# Altium PCB PCB.PcbDoc
Units mm, origin at the board's own origin, x right, y up, seen from the top; angles counter-clockwise.
Board outline 85.09 x 17.91 mm, 4 copper layers (Top Layer, GND, PWR, Bottom Layer), stack 1.11 mm thick; 46 components, 32 nets, 228 pads, 98 vias.
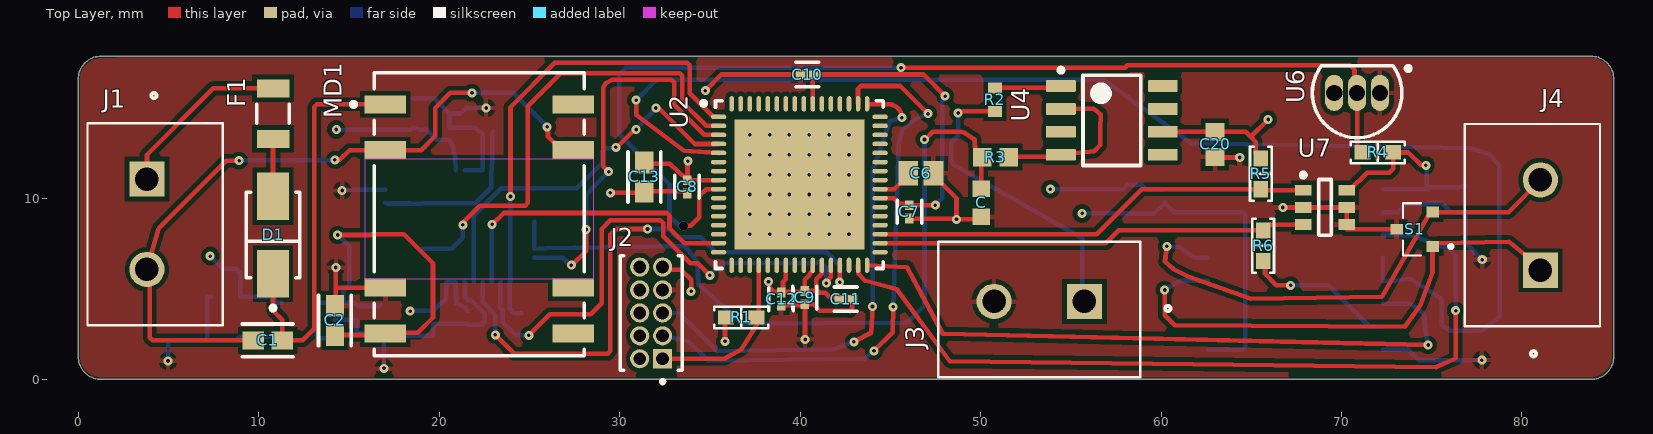
[diagram p0: Top Layer view]
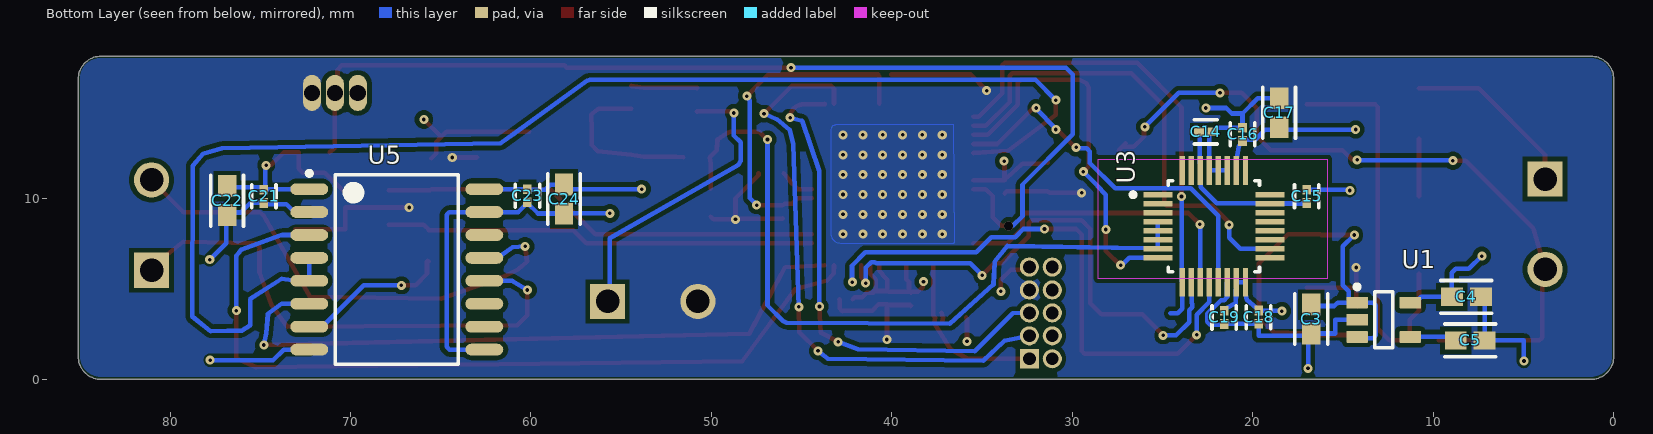
[diagram p1: Bottom Layer view, seen from below]
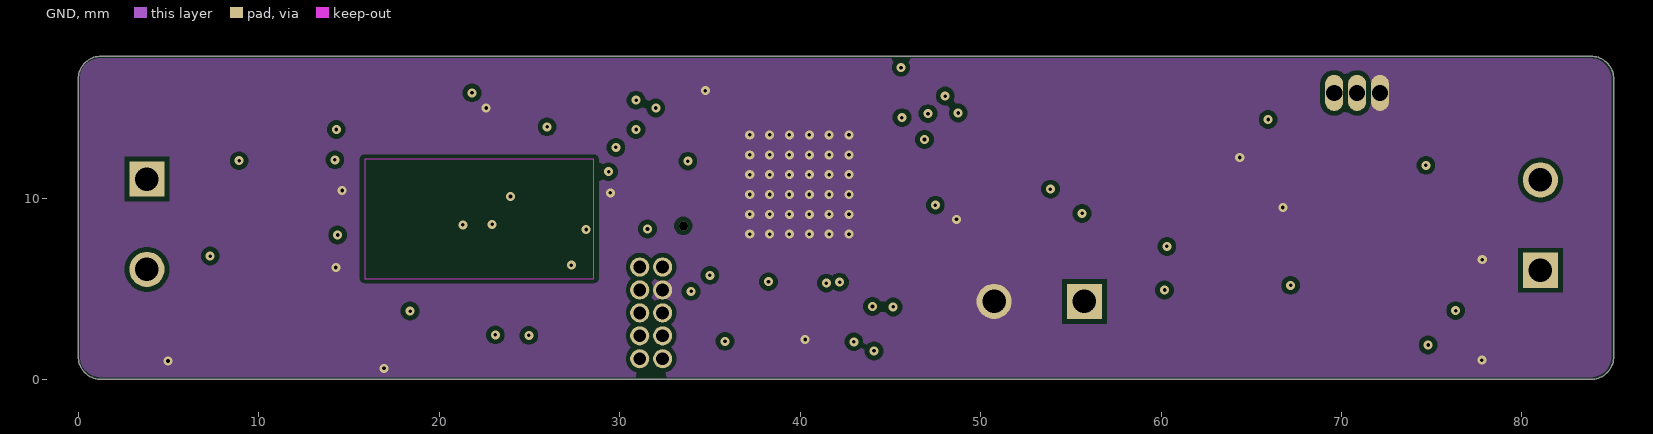
[diagram p2: GND]
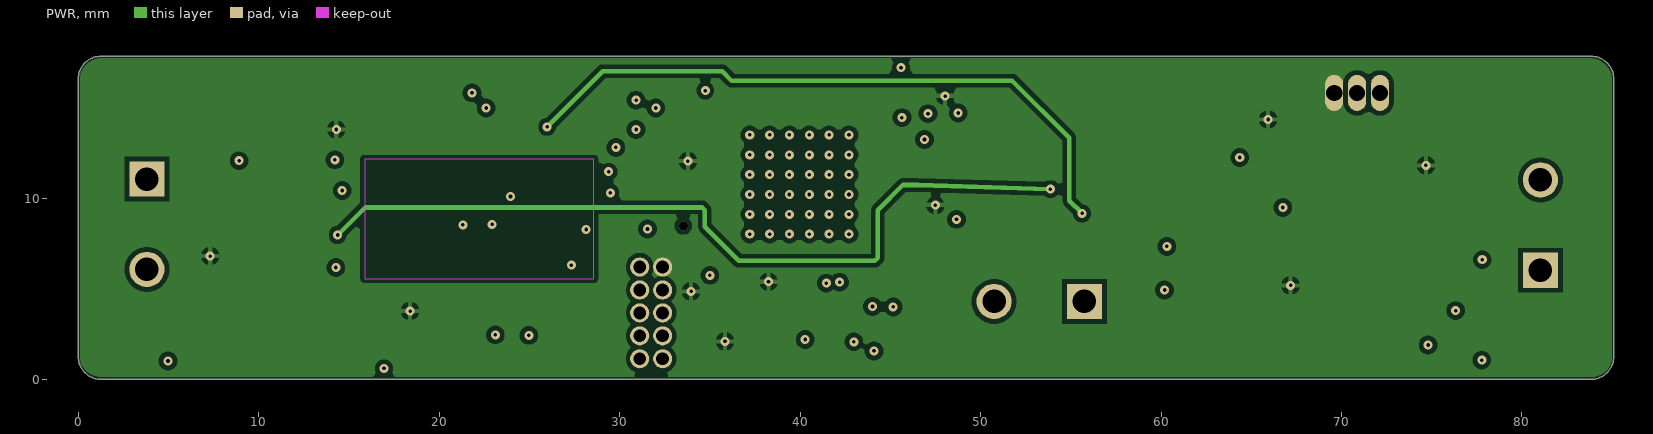
[diagram p3: PWR]
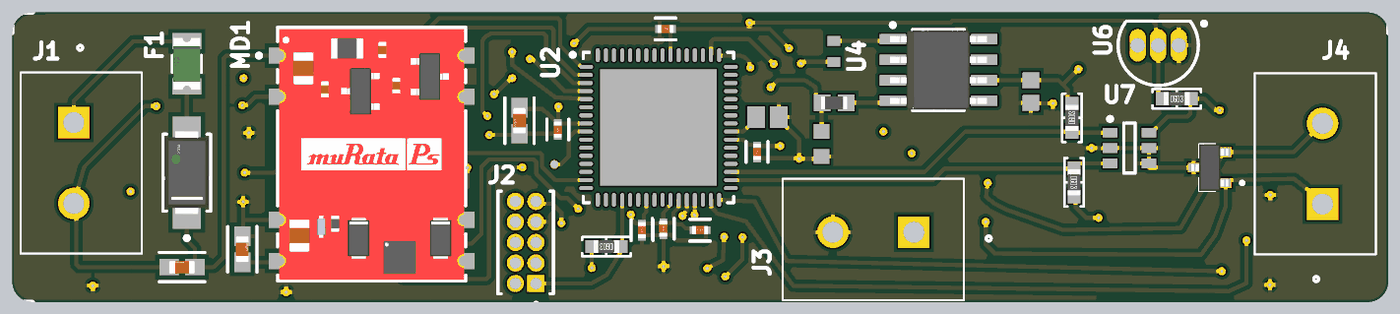
[diagram p4: 3D render of the assembled board from above, using the file's embedded part models]
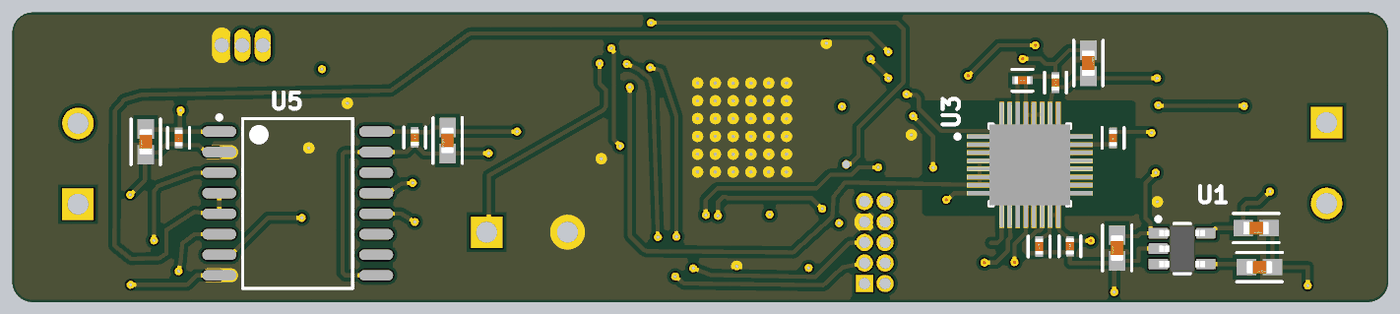
[diagram p5: 3D render of the assembled board from below, using the file's embedded part models]

## Layer stack, top to bottom
Top Solder: solder mask 0.0254, SM-001, Dk 4
Top Layer: signal copper 0.035
Dielectric 2: prepreg 0.1295, PP-017, Dk 4.3
GND: signal copper 0.035
Dielectric 3: core 0.7112, Core-039, Dk 4.8
PWR: signal copper 0.035
Dielectric 4: prepreg 0.1295, PP-017, Dk 4.3
Bottom Layer: signal copper 0.035
Bottom Solder: solder mask 0.0254, SM-001, Dk 4

## Board outline
0,1.27 0,16.637 cw(c1.27,16.637) 1.27,17.907 83.82,17.907 cw(c83.82,16.637) 85.09,16.637 85.09,1.27 cw(c83.82,1.27) 83.82,0 1.27,0 cw(c1.27,1.27)

## Design rules (kind name [scope] priority, off if disabled: settings)
Clearance [All] p1: gap=0.254 ignorepadtopadclearanceinfootprint=FALSE
PolygonConnect PolygonConnect_11 [All vs IsNamedPolygon('ISO_GND_L01_P023')] p1: connectstyle=Direct reliefconductorwidth=0.254 reliefentries=4 polygonreliefangle="90 Angle" airgapwidth=0.254
PolygonConnect PolygonConnect_10 [All vs IsNamedPolygon('ISO_GND_L01_P023')] p2: connectstyle=Direct reliefconductorwidth=0.254 reliefentries=4 polygonreliefangle="90 Angle" airgapwidth=0.254
PolygonConnect PolygonConnect_9 [All vs IsNamedPolygon('ISO_GND_L04_P024')] p3: connectstyle=Direct reliefconductorwidth=0.254 reliefentries=4 polygonreliefangle="90 Angle" airgapwidth=0.254
PolygonConnect PolygonConnect_8 [All vs IsNamedPolygon('C_AVDD_L03_P018')] p4: connectstyle=Direct reliefconductorwidth=0.254 reliefentries=4 polygonreliefangle="90 Angle" airgapwidth=0.254
PolygonConnect PolygonConnect_7 [All vs IsNamedPolygon('ISO_GND_L02_P019')] p5: connectstyle=Direct reliefconductorwidth=0.254 reliefentries=4 polygonreliefangle="90 Angle" airgapwidth=0.254
PolygonConnect PolygonConnect_6 [All vs IsNamedPolygon('ISO_GND_L01_P023')] p6: connectstyle=Direct reliefconductorwidth=0.254 reliefentries=4 polygonreliefangle="90 Angle" airgapwidth=0.254
PolygonConnect PolygonConnect_5 [All vs IsNamedPolygon('C_AVDD_L03_P018')] p7: thpad.connectstyle=Direct thpad.reliefconductorwidth=0.254 thpad.reliefentries=4 thpad.polygonreliefangle="90 Angle" thpad.airgapwidth=0.254 smdpad.connectstyle=Relief smdpad.reliefconductorwidth=0.254 smdpad.reliefentries=4 smdpad.polygonreliefangle="90 Angle" smdpad.airgapwidth=0.254 via.connectstyle=Relief via.reliefconductorwidth=0.254 via.reliefentries=4 via.polygonreliefangle="90 Angle" via.airgapwidth=0.254
PolygonConnect PolygonConnect_4 [All vs IsNamedPolygon('ISO_GND_L02_P019')] p8: connectstyle=Direct reliefconductorwidth=0.254 reliefentries=4 polygonreliefangle="90 Angle" airgapwidth=0.254
PolygonConnect PolygonConnect_3 [All vs IsNamedPolygon('C_AVDD_L03_P018')] p9: connectstyle=Direct reliefconductorwidth=0.254 reliefentries=4 polygonreliefangle="90 Angle" airgapwidth=0.254
PolygonConnect PolygonConnect_2 [All vs IsNamedPolygon('NONET_L01_P022')] p10: connectstyle=Direct reliefconductorwidth=0.254 reliefentries=4 polygonreliefangle="90 Angle" airgapwidth=0.254
PolygonConnect PolygonConnect_1 [All vs IsNamedPolygon('is')] p11: connectstyle=Direct reliefconductorwidth=0.254 reliefentries=4 polygonreliefangle="90 Angle" airgapwidth=0.254
PolygonConnect [All] p12: connectstyle=Relief reliefconductorwidth=0.254 reliefentries=4 polygonreliefangle="90 Angle" airgapwidth=0.254
RoutingVias [All] p1: holewidth=0.711 width=1.27 viastyle="Through Hole" minholewidth=0.711 minwidth=1.27 maxholewidth=0.711 maxwidth=1.27
SolderMaskExpansion [All] p1: expansion=0.102 istentingtop=FALSE
UnRoutedNet [All] p1: checkbadconnections=TRUE
Width [All] p1: maxlimit=0.254 minlimit=0.254 preferedwidth=0.254
29 further rules are at their usual default settings.

## Components (designator, comment, footprint, x,y, rotation, side; value= is the part's Value field where it differs from the comment)
C "CL10B104KO8NNNC" CAPC1608X90N 50.038,9.779 r270 top
C1 "GRM188R60J106ME47D" FP-GRM188-0_1-e0_2_0_55-IPC_A 10.501,2.159 r180 top
C2 "GRM188R60J106ME47D" FP-GRM188-0_1-e0_2_0_55-IPC_A 14.224,3.262 r90 top
C3 "GRM188R60J106ME47D" FP-GRM188-0_1-e0_2_0_55-IPC_A 16.764,3.342 r270 bottom
C4 "GRM188R60J106ME47D" FP-GRM188-0_1-e0_2_0_55-IPC_A 8.168,4.572 r180 bottom
C5 "GRM188R60J106ME47D" FP-GRM188-0_1-e0_2_0_55-IPC_A 7.961,2.159 r180 bottom
C6 "C0805C105K4PACTU" CAPC2013X145X50LL20T25 46.692,11.429 r180 top
C7 "C1005X7R1H104K050BB" FP-C1005-050-0_05-IPC_C 46.057,9.284 r90 top
C8 "C1005X7R1H104K050BB" FP-C1005-050-0_05-IPC_C 33.738,10.667 r90 top
C9 "C1005X7R1H104K050BB" FP-C1005-050-0_05-IPC_C 40.259,4.532 r90 top
C10 "C1005X7R1H104K050BB" FP-C1005-050-0_05-IPC_C 40.4,16.891 r0 top
C11 "C1005X7R1H104K050BB" FP-C1005-050-0_05-IPC_C 42.534,4.445 r180 top
C12 "C1005X7R1H104K050BB" FP-C1005-050-0_05-IPC_C 38.945,4.444 r90 top
C13 "GRM188R60J106ME47D" FP-GRM188-0_1-e0_2_0_55-IPC_A 31.369,11.216 r270 top
C14 "C1005X7R1H104K050BB" FP-C1005-050-0_05-IPC_C 22.62,13.716 r180 bottom
C15 "C1005X7R1H104K050BB" FP-C1005-050-0_05-IPC_C 17.018,10.146 r90 bottom
C16 "C1005X7R1H104K050BB" FP-C1005-050-0_05-IPC_C 20.574,13.575 r90 bottom
C17 "GRM188R60J106ME47D" FP-GRM188-0_1-e0_2_0_55-IPC_A 18.542,14.772 r90 bottom
C18 "C1005X7R1H104K050BB" FP-C1005-050-0_05-IPC_C 19.685,3.443 r270 bottom
C19 "C1005X7R1H104K050BB" FP-C1005-050-0_05-IPC_C 21.59,3.429 r270 bottom
C20 "GRM188R71C104KA01D" MURA-0603_H_0.9_M 62.992,13.019 r90 top
C21 "C1005X7R1H104K050BB" FP-C1005-050-0_05-IPC_C 74.803,10.146 r270 bottom
C22 "GRM188R60J106ME47D" FP-GRM188-0_1-e0_2_0_55-IPC_A 76.835,9.906 r270 bottom
C23 "C1005X7R1H104K050BB" FP-C1005-050-0_05-IPC_C 60.198,10.174 r270 bottom
C24 "GRM188R60J106ME47D" FP-GRM188-0_1-e0_2_0_55-IPC_A 58.166,9.993 r270 bottom
D1 "SS14" FP-403AE-MFG 10.795,8.001 r270 top
F1 "1206L050YR" FP-1206L050YR-MFG 10.795,14.729 r270 top
J1 "OSTTC020162" OST_OSTTC020162 3.81,11.096 r270 top
J2 "FTSH-105-01-L-D" SAMTEC_FTSH-105-01-L-D 32.385,1.143 r90 top
J3 "OSTTC020162" OST_OSTTC020162 55.753,4.318 r180 top
J4 "OSTTC020162" OST_OSTTC020162 81.026,6.049 r90 top
MD1 "NXJ2S0505MC-R7" FP-NXJ2SM-MFG 22.223,9.145 r270 top
R1 "10 kOhms" "YAGEO RES 0603_1608" 36.742,3.429 r180 top
R2 "RC0603FR-071ML" RESC1608X55X25LL10T15 50.8,15.494 r90 top
R3 "RC0603FR-07100RL" RESC1607X60N 50.827,12.319 r180 top
R4 "4.7 kOhms" "YAGEO RES 0603_1608" 72.009,12.573 r0 top
R5 "4.7 kOhms" "YAGEO RES 0603_1608" 65.532,11.391 r90 top
R6 "4.7 kOhms" "YAGEO RES 0603_1608" 65.659,7.405 r270 top
S1 "PESD1CAN,215" DIO_PESD1CAN,215 74.057,8.316 r180 top
U1 "LP2985-33DBVR" DBV0005A_M 12.749,3.302 r180 bottom
U2 "EFM32TG840F32-QFN64" ENMR-QFN64_N 39.961,10.794 r0 top
U3 "ADS124S08IPBSR" FP-PBS0032A-MFG 22.16,8.481 r180 bottom
U4 "LMP7721MA/NOPB" D0008A_M 57.277,14.351 r0 top
U5 "ADM2483BRWZ" ADI-ADM2483BRWZ-16_M 67.437,6.096 r180 bottom
U6 "DS18B20+" Q3+1 70.866,15.875 r90 top
U7 "24AA025E48T-I/OT" MCHP-SOT-23-OT6_L 69.088,9.525 r0 top

## Footprints (in the part's own frame and the unit in brackets; to place one, negate y for a bottom-side part, rotate by r counter-clockwise, add the part's x,y. Pads: shape width x height; smd on the part's side, far side on the other; paste and mask are expansions set on the pad)
ADI-ADM2483BRWZ-16_M [mm] "SOIC, 16-Leads, Body 10.5x7.6mm, Pitch 1.27mm, IPC Low Density"
  oval 2.1x0.65 smd: 1(-4.85,4.445) 2(-4.85,3.175) 3(-4.85,1.905) 4(-4.85,0.635) 5(-4.85,-0.635) 6(-4.85,-1.905) 7(-4.85,-3.175) 8(-4.85,-4.445) 9(4.85,-4.445) 10(4.85,-3.175) 11(4.85,-1.905) 12(4.85,-0.635) 13(4.85,0.635) 14(4.85,1.905) 15(4.85,3.175) 16(4.85,4.445)
  silkscreen extent -4.98,-5.25 3.4,5.44, body extent -3.8,-5.25 3.8,5.25, height 2.65
CAPC1608X90N [mm]
  rect 0.92x0.98 smd: 1(-0.775,0) 2(0.775,0)
CAPC2013X145X50LL20T25 [mm] "Chip Capacitor, 2-Leads, Body 2.00x1.25mm, IPC High Density"
  rect 1.1x1.35 smd: 1(-0.7,0) 2(0.7,0)
  body extent -1.1,-0.72 1.1,0.72, height 1.45
D0008A_M [mm] "SOIC, 8-Leads, Body 5x4mm, Pitch 1.27mm, IPC Low Density"
  rrect15% 1.65x0.65 smd: 1(-2.825,1.905) 2(-2.825,0.635) 3(-2.825,-0.635) 4(-2.825,-1.905) 5(2.825,-1.905) 6(2.825,-0.635) 7(2.825,0.635) 8(2.825,1.905)
  silkscreen extent -2.95,-2.5 1.6,2.9, body extent -3,-2.45 3,2.45, height 1.63
DBV0005A_M [mm] "SOT23, 5-Leads, Body 3.05x1.75mm, Pitch 0.95mm, IPC Low Density"
  rrect15% 1.2x0.65 smd: 1(-1.475,0.95) 2(-1.475,0) 3(-1.475,-0.95) 4(1.475,-0.95) 5(1.475,0.95)
  silkscreen extent -1.6,-1.55 0.5,1.95, body extent -1.42,-1.46 1.42,1.46, height 1.08
DIO_PESD1CAN,215 [mm]
  rect 0.7x0.6 smd paste-0.05: 1(-1,0.95) 2(-1,-0.95) 3(1,0)
  silkscreen extent -2.1,-1.45 0.65,1.45, body extent -1.15,-1.45 1.15,1.45, height 1.1
ENMR-QFN64_N [mm] "QFN, 64-Leads, Body 9x9mm, Pitch 0.5mm, IPC Medium Density"
  rect 7.2x7.2 smd: 0(0,0)
  oval 0.85x0.25 smd: 1(-4.475,3.75) 2(-4.475,3.25) 3(-4.475,2.75) 4(-4.475,2.25) 5(-4.475,1.75) 6(-4.475,1.25) 7(-4.475,0.75) 8(-4.475,0.25) 9(-4.475,-0.25) 10(-4.475,-0.75) 11(-4.475,-1.25) 12(-4.475,-1.75) 13(-4.475,-2.25) 14(-4.475,-2.75) 15(-4.475,-3.25) 16(-4.475,-3.75) 33(4.475,-3.75) 34(4.475,-3.25) 35(4.475,-2.75) 36(4.475,-2.25) 37(4.475,-1.75) 38(4.475,-1.25) 39(4.475,-0.75) 40(4.475,-0.25) 41(4.475,0.25) 42(4.475,0.75) 43(4.475,1.25) 44(4.475,1.75) 45(4.475,2.25) 46(4.475,2.75) 47(4.475,3.25) 48(4.475,3.75)
  oval 0.25x0.85 smd: 17(-3.75,-4.475) 18(-3.25,-4.475) 19(-2.75,-4.475) 20(-2.25,-4.475) 21(-1.75,-4.475) 22(-1.25,-4.475) 23(-0.75,-4.475) 24(-0.25,-4.475) 25(0.25,-4.475) 26(0.75,-4.475) 27(1.25,-4.475) 28(1.75,-4.475) 29(2.25,-4.475) 30(2.75,-4.475) 31(3.25,-4.475) 32(3.75,-4.475) 49(3.75,4.475) 50(3.25,4.475) 51(2.75,4.475) 52(2.25,4.475) 53(1.75,4.475) 54(1.25,4.475) 55(0.75,4.475) 56(0.25,4.475) 57(-0.25,4.475) 58(-0.75,4.475) 59(-1.25,4.475) 60(-1.75,4.475) 61(-2.25,4.475) 62(-2.75,4.475) 63(-3.25,4.475) 64(-3.75,4.475)
  silkscreen extent -5.42,-4.65 4.65,4.65, body extent -4.5,-4.5 4.5,4.5, height 0.9
FP-403AE-MFG [mm]
  rect 2.65x1.75 smd paste+0 mask+0: 1(-2.15,0) 2(2.15,0)
  silkscreen extent -2.38,-1.47 4.17,1.47, body extent -3.57,-1.58 3.57,1.58, height 0.25
FP-1206L050YR-MFG [mm]
  rect 1x1.8 smd paste+0 mask+0: 1(-1.4,0) 2(1.4,0)
  silkscreen extent -0.53,-0.9 0.53,0.9, body extent -2,-1 2,1, height 0.25
FP-C1005-050-0_05-IPC_C [mm]
  rect 0.539x0.472 smd paste+0 mask+0: 1(-0.367,0) 2(0.367,0)
  silkscreen extent -0.64,-0.67 0.64,0.68, body extent -0.74,-0.38 0.74,0.38, height 0.25
FP-GRM188-0_1-e0_2_0_55-IPC_A [mm]
  rect 1.208x1.012 smd paste+0 mask+0: 1(-0.802,0) 2(0.802,0)
  silkscreen extent -1.41,-0.91 1.41,0.91, body extent -1.91,-1.01 1.91,1.01, height 0.25
FP-NXJ2SM-MFG [mm]
  rect 1x2.3 smd paste+0 mask+0: 1(-6.095,-5.205) 2(-3.555,-5.205) 5(4.065,-5.205) 6(6.605,-5.205) 7(6.605,5.205) 8(4.065,5.205) 11(-3.555,5.205) 12(-6.095,5.205)
  Keep-Out Layer region: -3.055,-6.355 3.565,-6.355 3.565,6.355 -3.055,6.355
  Keep-Out Layer region: -3.055,-6.355 3.565,-6.355 3.565,6.355 -3.055,6.355
  silkscreen extent -7.85,-7.09 7.84,5.81, body extent -7.95,-6.46 7.95,6.46, height 0.25
FP-PBS0032A-MFG [mm]
  rect 1.6x0.3 smd paste-1000 mask+0: 1(-3.1,1.75) 2(-3.1,1.25) 3(-3.1,0.75) 4(-3.1,0.25) 5(-3.1,-0.25) 6(-3.1,-0.75) 7(-3.1,-1.25) 8(-3.1,-1.75) 17(3.1,-1.75) 18(3.1,-1.25) 19(3.1,-0.75) 20(3.1,-0.25) 21(3.1,0.25) 22(3.1,0.75) 23(3.1,1.25) 24(3.1,1.75)
  rect 0.3x1.6 smd paste-1000 mask+0: 9(-1.75,-3.1) 10(-1.25,-3.1) 11(-0.75,-3.1) 12(-0.25,-3.1) 13(0.25,-3.1) 14(0.75,-3.1) 15(1.25,-3.1) 16(1.75,-3.1) 25(1.75,3.1) 26(1.25,3.1) 27(0.75,3.1) 28(0.25,3.1) 29(-0.25,3.1) 30(-0.75,3.1) 31(-1.25,3.1) 32(-1.75,3.1)
  silkscreen extent -4.6,-2.53 2.52,2.53, body extent -2.5,-2.5 2.5,2.5, height 1.2
MCHP-SOT-23-OT6_L [mm] "SOT23, 6-Leads, Body 2.9x1.55mm, Pitch 0.95mm, IPC High Density"
  rect 0.9x0.6 smd: 1(-1.2,0.95) 2(-1.2,0) 3(-1.2,-0.95) 4(1.2,-0.95) 5(1.2,0) 6(1.2,0.95)
  silkscreen extent -1.32,-1.55 0.35,1.92, body extent -0.9,-1.55 0.9,1.55, height 1.45
MURA-0603_H_0.9_M [mm] "SMD, 2-Leads, Body 1.7x0.9mm, IPC Low Density"
  rect 1x1.05 smd: 1(-0.7,0) 2(0.7,0)
  body extent -0.85,-0.45 0.85,0.45, height 0.9
OST_OSTTC020162 [mm]
  rect 1.95x1.95 hole 1.3: 1(0,0)
  round 1.95 hole 1.3: 2(5,0)
  silkscreen extent -4.78,-3.3 8.1,4.2
Q3+1 [mm] "TO, Flat Index; 3 In-Line, Axial Leads; Body Dia. 4.7mm; Leads 0.56 x 0.51 mm (max)"
  oval 2x1 hole 0.9: 1(0,-1.27) 2(0,0) 3(0,1.27)
  silkscreen extent -2.48,-2.96 1.5,2.48, body extent -2.48,-2.5 1.5,2.5, height 4.96
RESC1607X60N [mm]
  rect 1.04x1.02 smd: 1(-0.735,0) 2(0.735,0)
  body extent -0.8,-0.4 0.8,0.4, height 0.55
RESC1608X55X25LL10T15 [mm] "Chip Resistor, 2-Leads, Body 1.70x0.90mm, IPC High Density"
  rect 0.6x0.8 smd: 1(-0.65,0) 2(0.65,0)
  body extent -0.85,-0.45 0.85,0.45, height 0.55
SAMTEC_FTSH-105-01-L-D [mm]
  rect 1.06x1.06 / inner round 1.06 / far side rect 1.06x1.06 hole 0.71: 01(0,0)
  round 1.06 hole 0.71: 02(0,1.27) 03(1.27,0) 04(1.27,1.27) 05(2.54,0) 06(2.54,1.27) 07(3.81,0) 08(3.81,1.27) 09(5.08,0) 10(5.08,1.27)
  silkscreen extent -1.37,-1.08 5.71,2.35
"YAGEO RES 0603_1608" [mm] "Chip Resistor, 2-Leads, Body 1.60x0.80mm"
  rect 0.9x0.8 smd: 1(-0.85,0) 2(0.85,0)
  silkscreen extent -1.5,-0.6 1.5,0.6, body extent -0.8,-0.4 0.8,0.4, height 0.45

## Part data
C: "0.1ÂµF Â±10% 16V Ceramic Capacitor X7R 0603 _1608 Metric_", Package="0603 Samsung", Availability=Unavailable, MF="Samsung Electro-Mechanics", MP=CL10B104KO8NNNC, Price=None, SnapEDA_Link=https://www.snapeda.com/parts/CL10B104KO8NNNC/Samsung%20Electro-Mechanics/view-part/3598551/?ref=snap
C1 C2 C3 C4 C5 C13 C17 C22 C24: library part CMP-2006-02792-2, "Chip Multilayer Ceramic Capacitors for General Purpose, 0603, 10uF, X5R, 15%, 20%, 6.3V", Capacitance=10uF, Case Code (Imperial)=0603, Case Code (Metric)=1608, Dielectric=X5R, Max Operating Temperature=85°C, Min Operating Temperature=-55°C, Package Quantity=4000, Tolerance=20%, Voltage=6.3V, Case/Package=0603, Depth=0.8mm, Height=0.8mm, Lead Free="Lead Free", Length=1.6mm, Material=Ceramic, Mount="Surface Mount", Packaging="Tape and Reel", Radiation Hardening=No, REACH SVHC="No SVHC", Termination=SMD/SMT, Thickness=0.035inch, Voltage Rating=6.3V, Voltage Rating (DC)=6.3V, Width=0.031inch
C6: library part CMP-1036-04746-2, Manufacturer=Kemet, Part Number=C0805C105K4PACTU
C7 C8 C9 C10 C11 C12 C14 C15 C16 C18 C19 C21 C23: library part CMP-2000-05393-2, "Multilayer Ceramic Capacitors 100nF ±10% 50V X7R SMD 0402", Capacitance=100nF, Case Code (Imperial)=0402, Case Code (Metric)=1005, Dielectric=X7R, Dielectric Material=Ceramic, Max Operating Temperature=125°C, Min Operating Temperature=-55°C, Package Quantity=1, Tolerance=10%, Voltage=50V, Case/Package=0402, Construction=Flat, Depth=0.5mm, Height=0.5mm, Lead Free="Lead Free", Length=1mm, Mount="Surface Mount", Packaging="Tape and Reel", Radiation Hardening=No, REACH SVHC="No SVHC", Resistor Type=Ceramic, RoHS Compliant=Yes, Series=C, Termination=SMD/SMT, Thickness=0.022inch, Voltage Rating=50V, Voltage Rating (DC)=50V, Weight=2.3E-05oz, Width=0.02inch
C20: library part CMP-2000-05253-1, "CAP, Ceramic, 0.1 uF, 10%, 16 V, 0603, RoHS, Tape and Reel", Capacitance=0.1uF, Capacitance - nF=100nF, Capacitance - pF=100000pF, Case Code - in=0603, Case Code - mm=1608, Case Height=0.8mm, Case Length=1.6mm, Dielectric=X7R, Manufacturer=Murata, Maximum Operating Temperature=+125C, Minimum Operating Temperature=-55C, Operating Temperature Range=-55Cto+125C, Package / Case=0603(1608metric), Temperature Coefficient / Code=+/-15%, Tolerance=10%, Voltage Rating=16V, Brand=MurataElectronics, Case Width=0.8mm, Datasheet URL=https://datasheet.ciiva.com/29202/451467-da-01-en-vs-kondensator-0603-29202287.pdf, Datasheet Version=Dec-10, Dimensions=0.8mmWx1.6mmLx0.8mmH, Factory Pack Quantity=4000, Manufacturer URL=http://www.murata.com/, Packaging=Reel, Product=GeneralTypeMLCCs, Product Category=MultilayerCeramicCapacitorsMLCC-SMD/SMT, RoHS=Details, Series=GRM, Termination Style=SMD/SMT, Type=GeneralPurposeMLCC, Voltage Rating DC=16V
D1: library part CMP-2000-04943-2, "DIODE SCHOTTKY 40V 1A SMA", Forward Current=1A, Manufacturer="ON Semiconductor", Max Junction Temp=+125°C, Max Repetitive Reverse Voltage=40V, Max Surge Forward Current=40A, Package=403AE, Peak Reverse Current=0.2mA, Temperature="-65°C to +125°C", Temperature Range Low=-65°C, Automotive=No, Category=Diode, ComponentLink2Description=Datasheet, ComponentLink2URL=https://www.onsemi.com/pub/Collateral/SS19-D.PDF, Device Class L1="Discrete Semiconductors", Device Class L2=Diodes, Device Class L3="Schottky Diodes", Digikey Description="DIODE SCHOTTKY 40V 1A SMA", Height=2.5mm, Lead Free=Yes, Manufacturer Part Number=SS14, Mouser Description="Schottky Diodes & Rectifiers SMA 40V 1.0A", Octopart=https://octopart.com/ss14-on+semiconductor-29205033, RoHS=TRUE, Standoff Height=0.05mm, Temperature Range High=+125°C
F1: library part CMP-08606-000073-1, "PTC RESET FUSE 6V 500MA 1206", Case Code (Imperial)=1206, Case Code (Metric)=3216, Current Rating=100A, Hold Current=500mA, Max Operating Temperature=85°C, Max Power Dissipation=600mW, Max Voltage Rating (DC)=6V, Min Operating Temperature=-40°C, Package Quantity=4000, Resistance=700mR, Trip Current=1A, Approvals=cULus, Case/Package=1206, Height=0.75mm, Lead Free="Lead Free", Length=3.4mm, Max Current Rating=100A, Operating Supply Voltage=6V, Packaging="Tape and Reel", Power Dissipation=600mW, REACH SVHC="No SVHC", RoHS Compliant=Yes, Series=1206L, Terminal Material=Copper, Termination=SMD/SMT, Time to Trip=0.1s, Voltage Rating=6V, Voltage Rating (DC)=6V, Width=1.8mm, Working Voltage=6V
J1 J3 J4: "2 Position Wire to Board Terminal Block Horizontal with Board 0.197 _5.00mm_ Through Hole", Package=None, Availability=Unavailable, MF="On Shore", MP=OSTTC020162, Price=None, SnapEDA_Link=https://www.snapeda.com/parts/OSTTC020162/On%20Shore%20Technology%20Inc./view-part/13090/?ref=snap
J2: Package=None, Availability=Unavailable, MF=Samtec, MP=FTSH-105-01-L-D, Price=None
MD1: library part CMP-20596-000009-1, "DC DC CONVERTER 5V 2W", RoHS Compliant=Yes
R1: library part AA0603FR-0710KL, "RES SMD 10K OHM 1% 1/10W 0603", Device Package="0603 (1608 Metric)", Manufacturer=Yageo, Operating Temperature="-55°C ~ 155°C", Power (Watts)="0.1W, 1/10W", Ratings=AEC-Q200, Supplier Device Package=0603, Supplier Part Number 1=13-AA0603FR-0710KLCT-ND, Temperature Coefficient=±150ppm/°C, Tolerance=±1%, ComponentLink1Description=Datasheet, ComponentLink1URL=https://www.yageo.com/upload/media/product/productsearch/datasheet/rchip/PYu-AA_51_RoHS_L_3.pdf, ComponentLink2Description="DigiKey Link", ComponentLink2URL=https://www.digikey.com/en/products/detail/yageo/AA0603FR-0710KL/5888698, Composition="Thick Film", Features="Anti-Sulfur, Automotive AEC-Q200, Moisture Resistant", Height - Seated (Max)="0.022\" (0.55mm)", LastUpdated="25/07/2024 9:19:15 am", Lifecycle Status=Active, Minimum Order=1, Number of Terminations=2, Package / Case="0603 (1608 Metric)", Packaging=TapeAndReel, Part Number=AA0603FR-0710KL, Part Status=Active, PartId=64302, Price=0.01, Resistance="10 kOhms", Series=AA, Size / Dimension="0.063\" L x 0.031\" W (1.60mm x 0.80mm)", Supplier 1=DigiKey
R2: library part CMP-1659-00056-1, "Chip Resistor, 1 MOhm, +/- 1%, 100 mW, -55 to 155 degC, 0603 (1608 Metric), RoHS, Tape and Reel", Capacitance="1 mF", Case\Package=Radial, Max Operating Temperature="85 degC", Min Operating Temperature="-40 degC", Package Quantity=200, Tolerance=20%, Voltage Rating="25 V", ComponentLink1Description="Manufacturer URL", ComponentLink1URL=http://www.yageo.com/, ComponentLink2Description=Datasheet, ComponentLink2URL=http://www.yageo.com/documents/recent/PYu-RC_Group_51_RoHS_L_04.pdf, DatasheetVersion="Rev. 4, 02/2016", Diameter="10 mm", Height="20 mm", Lead Pitch="5 mm", Length="20 mm", Mount="Through Hole", PackageDescription="2-Pin Surface Mount Device, Body 1.6 x 0.8 mm", PackageReference=0603, Packaging=Bulk, Radiation Hardening=No, REACH SVHC="No SVHC", RoHSCompliant=true, Voltage Rating (DC)="25 V", Width="0 inch"
R3: "100 Ohms Â±1% 0.1W, 1/10W Chip Resistor 0603 (1608 Metric) Moisture Resistant Thick Film", Package="0603 Yageo", Check_prices=https://www.snapeda.com/parts/RC0603FR-07100RL/Yageo/view-part/?ref=eda, MF=Yageo, MP=RC0603FR-07100RL, SnapEDA_Link=https://www.snapeda.com/parts/RC0603FR-07100RL/Yageo/view-part/?ref=snap
R4 R5 R6: library part AC0603FR-074K7L, "RES SMD 4.7K OHM 1% 1/10W 0603", Device Package="0603 (1608 Metric)", Manufacturer=Yageo, Operating Temperature="-55°C ~ 155°C", Power (Watts)="0.1W, 1/10W", Ratings=AEC-Q200, Supplier Device Package=0603, Supplier Part Number 1=YAG3613CT-ND, Temperature Coefficient=±100ppm/°C, Tolerance=±1%, ComponentLink1Description=Datasheet, ComponentLink1URL=https://www.yageo.com/upload/media/product/productsearch/datasheet/rchip/PYu-AC_51_RoHS_L_7.pdf, ComponentLink2Description="DigiKey Link", ComponentLink2URL=https://www.digikey.com/en/products/detail/yageo/AC0603FR-074K7L/5896160, Composition="Thick Film", Features="Automotive AEC-Q200, Moisture Resistant", Height - Seated (Max)="0.022\" (0.55mm)", LastUpdated="25/07/2024 9:19:24 am", Lifecycle Status=Active, Minimum Order=1, Number of Terminations=2, Package / Case="0603 (1608 Metric)", Packaging=CutTape, Part Number=AC0603FR-074K7L, Part Status=Active, PartId=17355, Price=0.01, Resistance="4.7 kOhms", Series=AC, Size / Dimension="0.063\" L x 0.031\" W (1.60mm x 0.80mm)", Supplier 1=DigiKey
S1: "70V Clamp 3A (8/20Âµs) Ipp Tvs Diode Surface Mount TO-236AB", Package="SC-59 Nexperia USA", Check_prices=https://www.snapeda.com/parts/PESD1CAN,215/Nexperia/view-part/?ref=eda, MF="Nexperia USA Inc.", MP=PESD1CAN,215, SnapEDA_Link=https://www.snapeda.com/parts/PESD1CAN,215/Nexperia/view-part/?ref=snap
U1: library part CMP-0758-00080-2, "Single Output Low Noise LDO, 150 mA, Fixed 3.3 V Output, 1.5% Tolerance, 2.2 to 16 V Input, Low IQ, 5-Pin SOT-23 (DBV), -40 to 125 degC, Green (RoHS & no Sb/Br), Tape and Reel", Manufacturer="Texas Instruments", Operating Temperature Range (degC)="-40 to 125", Accuracy (%)=1.5, ComponentLink1Description="Manufacturer URL", ComponentLink1URL=http://www.ti.com/, ComponentLink2Description=Datasheet, ComponentLink2URL=http://www.ti.com/lit/ds/symlink/lp2985-50.pdf, ComponentLink3Description="Package Specification", ComponentLink3URL=http://www.ti.com/litv/pdf/mpds018j, DatasheetVersion=SLVS522N, Fixed Output Options (V)=3.3, Iout (Max) (A)=0.15, Iq (Typ) (mA)=0.85, Mounting Technology="Surface Mount", Output Options="Fixed Output", PackageDescription="5-Pin Plastic Small Outline, Body 2.9 x 1.6 mm, Pitch 0.95 mm", PackageReference=DBV0005A, PackageVersion=4073253-4/L, Packing="Tape and Reel", PartNumber=LP2985-33DBVR, RoHS=TRUE, Vdo (Typ) (mV)=280, Vin (V)="2.2 to 16"
U2: library part CMP-0270-00147-1, "EFM32 Tiny Gecko, M3 ARM Cortex CPU, 32 KB Flash, 4 KB RAM, 1.85 - 3.8 V Supply, 32 MHz Max Speed, -40 to 85 degC, 64-Pin QFN, RoHS Compliant", Generic Part Number=EFM32TG840, Supply Voltage (V)="1.85 - 3.8", ADC=Y, AES=Y, ARM Cortex CPU=M3, ComponentLink1Description="Manufacturer URL", ComponentLink1URL=http://www.energymicro.com/, ComponentLink2Description=Datasheet, ComponentLink2URL=http://cdn.energymicro.com/dl/devices/pdf/d0011_efm32tg840_datasheet.pdf, ComponentLink3Description="Package Specification", ComponentLink3URL=http://cdn.energymicro.com/dl/devices/pdf/d0005_efm32g230_datasheet.pdf, DatasheetVersion="Rev 1.00", Flash (KB)=32, GPIO=56, I2C=1, LCD=8x20, LESENSE=Y, Max Speed (MHz)=32, Mounting Technology="Surface Mount", OPAMPS=3, PackageDescription="64-Pin Quad Flat No-Lead, Body 9 x 9 mm, Pitch 0.5 mm", PackageReference=QFN64, PackageVersion="Rev. 98SPP64048A_XO1_08MAR2011", PartNumber=EFM32TG840F32-QFN64, RAM (KB)=4, Subcategory="EFM32 Tiny Gecko", USART/SPI (I2S)=2
U3: library part CMP-04860-000020-1, "IC ADC 24BIT SIGMA-DELTA 32LQFP", Case/Package=LQFP, Max Operating Temperature=125°C, Min Operating Temperature=-50°C, Interface=SPI, Mount="Surface Mount", Number of A/D Converters=1, Number of Bits=24, Number of Inputs=12, Number of Pins=32, Packaging="Tape and Reel", RoHS Compliant=Yes, Sampling Rate=4000S/s
U4: library part CMP-0055-00395-3, "3 Femtoampere Input Bias Current Precision Amplifier, 8-pin Narrow SOIC, Pb-Free", Manufacturer="Texas Instruments", Package Reference=D0008A, PackageTopMarking=NSZXTT*LMP77*21MA, PowerWise=Y, Code_IPC=SOIC127P600-8, Code_JEDEC=MS-012-AA, ComponentLink1Description="Datasheet URL", ComponentLink1URL=http://www.ti.com/general/docs/lit/getliterature.tsp?genericPartNumber=LMP7721&fileType=pdf, CompType=Amplifiers, PackageDescription="SOIC Narrow, 4.9 x 3.9 x 1.45mm, 8 Lead, 1.27mm Pitch", PinCount=8, RoHS=Y
U5: library part CMP-2000-05041-1, "Half-Duplex, iCoupler(R) Isolated RS-485 Transceiver , 500 Kbps , -40 to 85 degC, 16-Pin SOIC (RW-16), RoHS, Tube", Dual Supply Voltage (Max)=5.25/5.5V, Dual Supply Voltage (Min)=2.7/4.75V, Dual Supply Voltage (Typ)=3.3/5V, Manufacturer="Analog Devices", Operating Temp Range=-40Cto85C, Operating Temperature Classification=Industrial, Package Type=SOICW, Power Supply Requirement=Dual, Single Supply Voltage (Max)=NotRequiredV, Supply Current=2.5mA, Data Rate=0.5kbps, Data Transmission Topology=Multipoint, Datasheet URL=https://datasheet.ciiva.com/19456/2169766-19456772.pdf, Datasheet Version="Rev. B, 03/2005", DELETED=Compliant, Interface Circuit Standard 1=EIA/TIA-485-A/RS-485, Manufacturer URL=http://www.analog.com/, Mounting=SurfaceMount, Number of Receivers=1, Number of Transceivers=1, Number of Transmitters=1, Packaging=Rail/Tube, Pin Count=16, Rad Hardened=No, Receiver Signal Type=Differential, Single Supply Voltage (Min)=NotRequiredV, Single Supply Voltage (Typ)=NotRequiredV, Transmitter Signal Type=Differential
U6: library part CMP-0253-00003-1, "Programmable Resolution Digital Thermometer, 1-Wire Interface, ±0.5°C Accuracy, 3-Pin TO92, -55°C to +125°C, Pb-Free", Code_JEDEC=TO-226-AA, ComponentLink1Description="Manufacturer URL", ComponentLink1URL=http://www.maxim-ic.com, ComponentLink2Description=Datasheet, ComponentLink2URL=http://datasheets.maxim-ic.com/en/ds/DS18B20.pdf, DatasheetVersion=2007, PackageDescription="TO-92 Package, Body Dia. 4.7mm; Leads 0.51 x 0.51 mm (max), Pb-Free", PackageReference=Q3+1, PackageVersion="revB, 2009"
U7: library part CMP-0159-01033-1, "2K bits I2C™ Serial EEPROM with EUI-48™ Node Identity, 1.7 to 5.5 V, 400 kHz, -40 to 85 degC, 6-pin SOT-23 (OT6), Tape and Reel", Manufacturer=Microchip, ComponentLink1Description="Manufacturer URL", ComponentLink1URL=http://www.microchip.com, ComponentLink2Description=Datasheet, ComponentLink2URL=http://ww1.microchip.com/downloads/en/DeviceDoc/22124D.pdf, ComponentLink3Description="Package Specification", ComponentLink3URL=http://www.microchip.com/stellent/groups/techpub_sg/documents/packagingspec/en012702.pdf, ComponentLink4Description="Product URL", ComponentLink4URL=http://www.microchip.com/24AA025E48, DatasheetVersion="Rev. D", Mounting Technology="Surface Mount", PackageDescription="6-Lead Plastic Small Outline Transistor, 2.9 x 1.55 mm Body, 0.95 mm Pitch", PackageReference=SOT-23-OT6, PackageVersion=C04-028B, PartNumber=24AA025E48T-I/OT

## Via types
v1: diameter 0.5, hole 0.2, Top Layer to Bottom Layer, 96 vias
v2: diameter 0.5, hole 0.22, Top Layer to Bottom Layer, 1 vias
v3: diameter 0.5, hole 0.5, Top Layer to Bottom Layer, 1 vias

## Nets (pads, with @x,y where several pads share a name; then routed paths per layer and width w, separated by ;. In a path a pad name is that pad's centre, name@x,y a point inside that pad or via, vN(x,y) a via of type N, cw(c..) or ccw(c..) an arc to the next point about the centre after c; other vN are vias at no path point)
+5V_ISO: C2.1 C3.1 C23.1 C24.1 MD1.6 U1.1 U1.3 U5.16 | length 79.4
  Top Layer w0.254: C2.1 16.938,2.46 MD1.6 18.041,2.591 18.821,2.591 19.66,3.429 19.66,6.426 18.034,8.052 16.264,8.052 16.213,8.001 v1(14.376,8.001)
  PWR w0.254: v1(14.376,8.001) 15.9,9.525 34.573,9.525 34.722,9.376 34.722,8.458 36.601,6.579 44.149,6.579 44.298,6.727 44.298,9.373 45.695,10.77 46.533,10.77 v1(53.873,10.541)
  Bottom Layer w0.254: U1.3 14.158,2.286 13.331,2.286 13.183,2.435 13.183,4.103 13.331,4.252 U1.1 ; v1(14.376,8.001) 15.011,7.366 15.011,5.207 14.697,4.893 14.697,4.45 14.499,4.252 15.306,4.252 15.494,4.064 16.684,4.064 C3.1 ; v1(53.873,10.541) 57.912,10.541 C24.1 58.919,10.795 59.219,10.501 60.089,10.501 C23.1 U5.16
ADC_CS: U2.1 U3.9 | length 26.7
  Top Layer w0.254: v1(23.952,10.135) 23.952,15.088 26.416,17.551 33.735,17.551 33.884,17.403 33.884,15.85 35.19,14.544 U2.1
  Bottom Layer w0.254: v1(23.952,10.135) 23.931,10.113 23.931,5.402 U3.9 23.91,3.903 24.155,3.658 24.562,3.658
ADC_DRDY: U2.4 U3.13 | length 21
  Top Layer w0.254: v1(29.794,12.852) 29.858,12.852 30.848,13.843 v1(30.912,13.843) v1@30.912,13.889 ; v1(32.004,15.037) 32.171,15.037 34.164,13.044 U2.4
  Bottom Layer w0.254: U3.13 21.91,9.058 23.444,10.592 27.635,10.592 29.032,11.989 29.032,12.627 29.21,12.805 29.747,12.805 v1(29.794,12.852) ; v1(30.912,13.843) 30.912,13.894 32.004,14.986 v1(32.004,15.037)
ADC_RESET: U2.2 U3.18 | length 26.2
  Top Layer w0.254: v1(21.311,8.56) 21.311,8.687 22.25,9.627 24.769,9.627 24.917,9.775 24.917,15.138 26.746,16.967 33.328,16.967 33.477,16.818 33.477,15.367 34.8,14.044 U2.2
  Bottom Layer w0.254: U3.18 20.693,7.231 21.311,7.849 v1(21.311,8.56)
ADC_START: U2.3 U3.8 | length 21.7
  Top Layer w0.254: v1(27.33,6.325) 27.356,6.325 28.143,7.112 v1(28.143,8.306) ; v1(29.388,11.506) 29.083,11.811 29.083,16.162 29.21,16.382 29.608,16.612 32.871,16.612 33.02,16.463 33.02,15.215 34.691,13.544 U2.3
  Bottom Layer w0.254: U3.8 26.857,6.731 27.264,6.325 v1(27.33,6.325) ; v1(28.143,8.306) 28.143,10.236 28.626,10.719 28.626,10.744 v1(29.388,11.506)
AIN0: C.1 R3.2 U3.4 U3.5 U3.6 U3.7 | length 41.1
  Top Layer w0.254: v1(46.894,13.289) 46.932,13.289 47.36,13.716 48.947,13.716 49.085,13.675 49.666,13.3 49.699,12.702 R3.2 50.048,11.936 50.048,10.887 C.1
  Bottom Layer w0.254: U3.4 U3.5 U3.6 U3.7 25.933,7.254 33.607,7.392 34.295,6.519 34.374,5.258 36.792,3.07 45.836,3.14 46.013,3.214 46.894,4.095 v1(46.894,13.289)
C_AVDD: C4.1 C7.2 C8.2 C9.2 C10.2 C11.2 C12.2 C13.1 C16.1 C17.1 C18.1 C19.1 C20.2 C21.1 C22.1 J2.09 R1.2 R4.2 R5.2 R6.2 U1.5 U2.8 U2.23 U2.26 U2.27 U2.39 U2.55 U3.15 U3.16 U3.26 U4.6 U5.1 U5.7 U6.3 U7.6 | length 85.6
  Top Layer w0.254: C13.1 31.748,11.938 32.783,11.938 C8.2@33.629,11.176 ; J2.09 32.539,6.069 33.403,6.069 33.96,5.512 v1(33.96,4.877) ; v1(33.782,12.09) 33.76,12.068 33.76,11.176 33.747,11.176 33.747,11.043 C8.2 33.847,11.044 U2.8 ; v1(35.839,2.108) 35.839,3.376 R1.2 ; v1(38.252,5.41) 38.299,5.363 38.299,5.109 38.557,4.851 38.904,4.851 C12.2 39.054,4.92 39.054,5.399 39.211,5.556 U2.23 ; C12.2@38.989,4.855 40.215,4.855 C9.2 ; U2.26 40.711,6.023 40.538,5.85 40.538,5.791 40.259,5.512 C9.2 ; U2.55 40.711,16.782 C10.2 46.848,16.891 v1(48.042,15.697) ; U2.27 41.209,6.317 41.209,5.852 40.894,5.537 40.894,4.949 41.043,4.801 ; C11.2 42.058,4.554 41.648,4.554 41.402,4.801 41.043,4.801 ; U2.39 45.205,10.035 45.519,9.725 45.948,9.725 C7.2 ; C7.2 v1(47.498,9.652) ; U4.6 60.8,13.719 62.594,13.719 C20.2 64.691,13.719 64.975,13.435 ; R5.2 65.259,12.514 65.259,13.151 64.975,13.435 ; R6.2 65.659,6.528 65.71,6.579 65.735,6.579 65.761,6.553 65.761,5.842 66.396,5.207 v1(67.183,5.207) ; v1(65.938,14.402) 65.938,14.398 64.975,13.435 ; U7.6 70.438,10.475 71.418,11.455 72.644,11.455 72.859,11.67 R4.2 73.711,12.573 74.422,11.862 v1(74.676,11.862) ; C9.2 40.945,4.899 cw(c40.945,4.801) 41.043,4.801
  Bottom Layer w0.254: v1(7.315,6.833) 7.33,6.833 8.041,6.121 8.763,6.121 8.97,5.915 C4.1 10.679,4.572 10.999,4.252 U1.5 ; v1(14.3,13.843) 18.415,13.843 C17.1 18.921,13.843 19.309,13.843 19.864,13.283 20.465,13.283 C16.1 20.79,12.883 20.887,12.254 U3.26 ; v1(18.39,3.785) 18.402,3.797 19.672,3.797 C18.1 19.794,3.953 20.336,4.413 20.387,4.708 U3.16 U3.15 20.933,4.708 20.949,4.226 21.481,3.938 C19.1 ; v1(47.498,9.652) 47.498,9.67 47.879,10.051 47.879,15.468 48.042,15.631 v1(48.042,15.697) ; v1(67.183,5.207) 69.276,5.207 71.562,2.921 U5.7 ; U5.1 74.694,10.541 C21.1 ; v1(74.676,11.862) 74.723,11.815 74.723,10.655 76.456,10.655 C22.1
GND_IN: C1.2 C23.2 C24.2 J1.2 MD1.2 MD1.11 U5.9 U5.15 | length 96.1
  Top Layer w0.254: v1(8.915,12.116) 8.204,12.116 4.492,8.404 4.427,8.293 J1.2 3.962,5.944 3.962,2.311 4.115,2.159 C1.2 ; v1(14.224,12.167) 14.499,12.167 15.032,12.7 MD1.2 18.999,12.7 19.787,13.487 19.787,15.037 20.625,15.875 v1(21.819,15.875) ; v1(25.984,13.995) 26.031,13.948 26.031,13.447 26.591,12.887 MD1.11@27.241,12.887 ; MD1.11@27.055,13.073 MD1.11@27.241,12.887 ; MD1.11 MD1.11@27.241,12.887
  PWR w0.254: v1(25.984,13.995) 29.058,17.069 35.687,17.069 36.22,16.535 51.765,16.535 54.915,13.386 54.915,9.906 v1(55.626,9.195)
  Bottom Layer w0.254: v1(8.915,12.116) 8.941,12.141 14.199,12.141 v1(14.224,12.167) ; v1(21.819,15.875) 24.105,15.875 v1(25.984,13.995) ; v1(55.626,9.195) 58.162,9.195 C24.2 59.615,9.191 C23.2@60.198,9.774 ; C23.2 C23.2@60.198,9.774 ; U5.9 64.516,1.651 64.668,1.803 64.668,9.122 64.52,9.271 U5.15 60.701,9.271 C23.2@60.198,9.774
I2C_SCL: R5.1 U2.35 U7.1 | length 24.5
  Top Layer w0.254: U2.35 56.431,8.044 58.928,10.541 R5.1 65.598,10.475 U7.1
I2C_SDA: R6.1 U2.34 U7.3 | length 23.9
  Top Layer w0.254: U2.34 56.947,7.544 57.658,8.255 R6.1 ; R6.1@65.659,8.302 65.932,8.575 U7.3
ISE_SIGNAL: R2.2 U4.1 | length 3.7
  Top Layer w0.254: R2.2 51.073,16.152 53.754,16.152 U4.1
ISO_GND: C2.2 C3.2 C4.2 C5.2 C6.1 C7.1 C8.1 C9.1 C10.1 C11.1 C12.1 C13.2 C14.2 C15.2 C16.2 C17.2 C18.2 C19.2 C20.1 C21.2 C22.2 C.2 J2.07 J3.2 MD1.5 S1.3 U1.2 U2.0 U3.14 U3.27 U3.28 U3.29 U5.2 U5.8 U6.1 U7.2 U7.4 U7.5 | length 85
  Top Layer w0.254: C2.2 14.275,4.115 14.275,5.156 ; v1(14.275,6.198) 14.275,5.156 ; MD1.5 14.351,5.08 14.275,5.156 ; v1(29.489,10.338) 31.293,10.338 C13.2 33.629,10.414 33.738,10.305 C8.1 ; v1(34.747,16.002) 35.636,16.891 C10.1 ; C12.1@38.977,4.077 38.964,4.064 38.95,4.077 C12.1 38.989,4.121 40.215,4.121 40.255,4.162 40.272,4.146 40.272,2.223 v1(40.284,2.21) ; C9.1 40.742,4.165 41.097,3.81 42.726,3.81 42.752,3.785 42.901,3.933 C11.1 C11.1@42.908,4.438 ; C7.1 46.084,8.891 48.64,8.891 v1(48.666,8.865) ; C6.1 47.392,11.304 48.666,10.03 v1(48.666,8.865) ; C.2 49.899,8.865 v1(48.666,8.865) ; C20.1 63.017,12.294 v1(64.364,12.294) ; v1(66.751,9.525) U7.2 U7.5 U7.4 70.288,8.316 S1.3
  Bottom Layer w0.254: v1(4.978,1.016) 4.978,2.159 C5.2 7.159,4.572 C4.2 ; U1.2 15.443,3.302 15.443,2.54 C3.2 ; v1(14.63,10.465) 14.63,10.512 C15.2 ; v1(16.942,0.61) 16.942,2.515 16.916,2.54 C3.2 ; C17.2 19.732,15.574 20.574,14.732 ; U3.14@21.387,5.404 U3.14 21.433,5.358 21.433,4.543 21.582,4.394 21.768,4.394 22.53,3.632 22.53,3.2 22.352,3.023 21.644,3.023 21.59,3.077 C18.2 19.685,2.413 16.764,2.413 C3.2 ; U3.27 U3.29 22.41,13.593 22.287,13.716 C14.2 22.22,13.716 21.995,13.941 C16.2 20.574,14.732 ; v1(22.606,15.037) 21.478,15.037 21.173,14.732 20.574,14.732 ; U5.8 73.711,1.651 74.295,1.067 v1(77.775,1.067) ; U5.2 73.119,9.271 73.551,9.703 74.727,9.703 C21.2 75.54,9.779 76.073,9.246 76.694,9.246 C22.2 76.886,9.053 76.886,7.544 v1(77.8,6.629) v1@77.699,6.731
  other v1: 37.211,8.044 38.311,8.044 39.411,8.044 40.511,8.044 41.611,8.044 42.711,8.044 37.211,9.144 38.311,9.144 39.411,9.144 40.511,9.144 41.611,9.144 42.711,9.144 37.211,10.244 38.311,10.244 39.411,10.244 40.511,10.244 41.611,10.244 42.711,10.244 37.211,11.344 38.311,11.344 39.411,11.344 40.511,11.344 41.611,11.344 42.711,11.344 37.211,12.444 38.311,12.444 39.411,12.444 40.511,12.444 41.611,12.444 42.711,12.444 37.211,13.544 38.311,13.544 39.411,13.544 40.511,13.544 41.611,13.544 42.711,13.544
NetC5_1: C5.1 U1.4 | length 2.6
  Bottom Layer w0.254: C5.1 8.956,2.352 U1.4
NetC6_2: C6.2 U2.40 | length 2
  Top Layer w0.254: U2.40 45.21,10.541 45.569,10.881 C6.2
NetD1_1: D1.1 F1.2 | length 3.2
  Top Layer w0.254: D1.1 F1.2
NetF1_1: F1.1 J1.1 | length 9.9
  Top Layer w0.254: J1.1 3.81,12.446 7.493,16.129 F1.1
NetJ3_1: J3.1 R2.1 | length 16.9
  Top Layer w0.254: v1(48.764,14.759) 48.831,14.759 48.931,14.859 50.785,14.859 R2.1
  Bottom Layer w0.254: v1(48.764,14.759) 48.764,13.514 48.381,13.132 48.381,12.101 48.509,11.881 55.625,7.82 55.625,5.166 J3.1
OPAMP_FB: R3.1 U4.2 U4.4 | length 9.3
  Top Layer w0.254: R3.1 51.955,12.336 53.754,12.336 U4.4 56.297,12.632 56.642,12.985 56.642,13.844 56.65,14.698 56.283,14.986 U4.2
REFP0: C14.1 C15.1 U3.23 U3.30 | length 9.3
  Bottom Layer w0.254: C15.1 17.127,9.747 18.387,9.747 U3.23 19.083,9.754 21.996,9.754 22.887,10.644 22.887,11.558 U3.30 22.933,12.254 22.933,13.607 C14.1
RESETn: J2.01 R1.1 U2.20 | length 10
  Top Layer w0.254: J2.01 35.806,1.143 36.747,1.666 37.66,3.137 R1.1 37.711,3.548 U2.20 ; R1.1@37.222,3.195 37.189,3.335 37.167,3.428 37.205,3.549 R1.1@37.252,3.701
RS485_A: J4.1 S1.1 U5.12 | length 29
  Top Layer w0.254: v1(60.198,4.953) 60.198,3.551 60.759,2.995 73.515,2.922 74.401,4.162 75.042,5.927 75.042,7.193 S1.1 75.28,7.539 79.271,7.618 80.178,6.897 J4.1
  Bottom Layer w0.254: v1(60.198,4.953) 61.037,5.461 U5.12
RS485_B: J4.2 S1.2 U5.13 | length 28
  Top Layer w0.254: v1(60.325,7.366) 60.22,6.528 60.681,6.118 61.453,5.723 64.98,4.461 72.245,4.57 74.834,9.093 S1.2 75.28,9.271 79.264,9.271 J4.2
  Bottom Layer w0.254: v1(60.325,7.366) 61.026,7.32 61.862,6.731 U5.13
RS485_DIR: U2.5 U5.4 U5.5 | length 74.1
  Top Layer w0.254: v1(30.912,15.469) 30.912,14.779 30.92,14.662 33.579,12.664 U2.5
  Bottom Layer w0.254: v1(30.912,15.469) 32.046,16.603 56.734,16.603 56.883,16.554 60.961,13.588 61.682,13.08 77.122,12.817 78.158,12.512 78.74,11.833 78.769,3.478 77.752,2.669 76.01,2.707 75.565,2.992 75.565,4.445 73.816,5.574 73.012,5.461 U5.5 U5.4
SPI_MISO: U2.29 U3.12 | length 32.2
  Top Layer w0.254: v1(23.114,2.464) 24.155,1.422 29.341,1.422 29.489,1.571 29.489,8.026 29.794,8.331 v1(31.547,8.331) ; U2.29 42.209,6.317 42.209,5.404 v1(42.189,5.385) v1@42.24,5.334
  Bottom Layer w0.254: U3.12 22.41,4.285 23.114,3.581 v1(23.114,2.464) ; v1(31.547,8.331) 32.715,8.331 33.172,7.874 34.493,7.874 35.331,7.036 41.478,7.036 42.215,6.299 42.215,5.41 v1(42.189,5.385)
SPI_MOSI: U2.28 U3.10 | length 29.7
  Top Layer w0.254: v1(24.968,2.438) 26.137,3.607 28.397,3.607 29.007,4.216 29.007,8.331 29.489,8.814 32.262,8.814 32.41,8.665 32.41,7.925 33.909,6.426 34.341,6.426 v1(35.001,5.766) ; v1(41.453,5.334) 41.453,5.401 41.709,5.657 41.709,6.317 U2.28
  Bottom Layer w0.254: U3.10 23.387,5.358 23.387,4.217 23.368,4.198 23.368,3.988 23.52,3.835 23.52,3.175 24.257,2.438 v1(24.968,2.438) ; v1(35.001,5.766) 35.662,6.426 40.869,6.426 40.941,6.499 41.152,6.499 41.453,6.198 v1(41.453,5.334)
SPI_SCK: U2.15 U3.11 | length 17.1
  Top Layer w0.254: v1(22.936,8.585) 23.571,9.22 32.617,9.22 32.766,9.071 32.766,8.374 33.596,7.544 U2.15
  Bottom Layer w0.254: U3.11 22.923,5.394 22.923,8.572 v1(22.936,8.585)
SWCLK: J2.05 U2.49 | length 27.6
  Top Layer w0.254: v1(42.977,2.083) 43.95,2.586 v2(44.018,4.039) ; U2.49 ccw(c43.74,15.269) 43.74,15.24 44.907,15.24 cw(c44.907,14.503) v1(45.644,14.503)
  Bottom Layer w0.254: J2.05 33.299,3.658 35.418,1.551 41.875,1.667 v1(42.977,2.083) ; v2(44.018,4.039) 44.018,11.467 44.032,11.548 44.973,14.315 v1(45.644,14.503)
SWDIO: J2.03 U2.50 | length 32.1
  Top Layer w0.254: U2.50 43.211,16.107 43.36,16.256 45.557,16.256 v1(47.087,14.726) ; v1(44.094,1.575) 45.138,2.602 v1(45.161,4.013)
  Bottom Layer w0.254: J2.03 33.761,2.133 34.932,1.043 43.553,1.147 v1(44.094,1.575) ; v1(45.161,4.013) 45.472,13.03 45.667,13.827 46.376,14.405 v1(47.087,14.726)
TEMP_DQ: R4.1 U2.9 U6.2 | length 59.3
  Top Layer w0.254: v3(33.528,8.509) 33.934,8.509 34.417,8.992 34.417,10.16 34.801,10.544 U2.9 ; v1(45.593,17.272) 58.009,17.272 58.136,17.399 70.485,17.399 70.723,17.161 70.723,16.018 U6.2 70.866,12.846 R4.1
  Bottom Layer w0.254: v3(33.528,8.509) 33.296,8.509 32.766,9.039 32.766,10.795 29.972,13.589 29.972,16.891 30.353,17.272 v1(45.593,17.272)
USART0_RX: U2.31 U5.3 | length 45.9
  Top Layer w0.254: U2.31 43.23,5.862 43.578,5.48 45.373,4.985 48.295,1.003 75.228,0.668 76.327,1.161 v1(76.327,3.81)
  Bottom Layer w0.254: U5.3 73.777,8.001 73.864,7.985 76.068,7.177 76.327,6.842 v1(76.327,3.81)
USART0_TX: U2.32 U5.6 | length 37.5
  Top Layer w0.254: U2.32 45.92,6.214 47.905,2.536 v1(74.803,1.905)
  Bottom Layer w0.254: U5.6 73.822,4.191 74.574,3.632 74.675,2.553 v1(74.803,1.905)
Vin_DC: C1.1 D1.2 MD1.1 | length 22.2
  Top Layer w0.254: D1.2 10.795,3.81 11.303,3.302 C1.1 12.446,2.159 13.081,2.794 13.081,15.091 13.23,15.24 MD1.1
pads on no net: J2.02 J2.04 J2.06 J2.08 J2.10 MD1.7 MD1.8 MD1.12 U2.6 U2.7 U2.10 U2.11 U2.12 U2.13 U2.14 U2.16 U2.17 U2.18 U2.19 U2.21 U2.22 U2.24 U2.25 U2.30 U2.33 U2.36 U2.37 U2.38 U2.41 U2.42 U2.43 U2.44 U2.45 U2.46 U2.47 U2.48 U2.51 U2.52 U2.53 U2.54 U2.56 U2.57 U2.58 U2.59 U2.60 U2.61 U2.62 U2.63 U2.64 U3.1 U3.2 U3.3 U3.17 U3.19 U3.20 U3.21 U3.22 U3.24 U3.25 U3.31 U3.32 U4.3 U4.5 U4.7 U4.8 U5.10 U5.11 U5.14

## Polygon pours and split planes (outlines as drawn)
ISO_GND on Top Layer "ISO_GND_L01_P023" (solid, pour order 23): 2.032,17.78 2.032,17.831 83.769,17.831 cw(c83.769,16.637) 84.963,16.637 84.963,1.27 cw(c83.82,1.27) 83.82,0.127 1.295,0.127 cw(c1.295,1.321) 0.102,1.321 0.102,16.612 cw(c1.27,16.612) 1.27,17.78 2.032,17.78 ccw(c2.032,17.831) 2.083,17.831
ISO_GND on Bottom Layer "ISO_GND_L04_P024" (solid, pour order 24): 83.922,17.78 cw(c83.922,16.739) 84.963,16.739 84.963,1.245 cw(c83.871,1.245) 83.871,0.152 1.245,0.152 cw(c1.245,1.295) 0.102,1.295 0.102,16.662 cw(c1.219,16.662) 1.219,17.78
ISO_GND on Bottom Layer "ISO_GND_L04_P025" (solid, pour order 25): 36.576,14.097 43.104,14.097 cw(c43.104,13.818) 43.383,13.818 43.383,8.096 cw(c42.838,8.096) 42.838,7.551 36.594,7.551 cw(c36.594,7.62) 36.525,7.62
ISO_GND on GND "ISO_GND_L02_P019" (solid, pour order 19): 1.93,17.805 83.769,17.805 cw(c83.769,16.637) 84.938,16.637 84.938,1.245 cw(c83.82,1.245) 83.82,0.127 1.245,0.127 cw(c1.245,1.27) 0.102,1.27 0.102,16.688 cw(c1.194,16.688) 1.194,17.78
C_AVDD on PWR "C_AVDD_L03_P018" (solid, pour order 18): 83.795,17.78 cw(c83.795,16.612) 84.963,16.612 84.963,1.194 cw(c83.922,1.194) 83.922,0.152 1.245,0.152 cw(c1.245,1.295) 0.102,1.295 0.102,16.612 cw(c1.27,16.612) 1.27,17.78 1.372,17.78

## Silkscreen, mask and mechanical layers (free items; w line width, h text height)
Mechanical 1:
  lines w0.254: 0,1.27 ccw(c1.27,1.27) 1.27,0 22.479,0 83.82,0 ccw(c83.82,1.27) 85.09,1.27 85.09,16.637 ccw(c83.82,16.637) 83.82,17.907 1.27,17.907 ccw(c1.27,16.637) 0,16.637 0,1.27

## Dimensions
1.27,17.907 to 1.27,0 on Top Overlay
0,16.637 to 85.09,16.637 on Top Overlay